# Altium PCB PCB1.PcbDoc
Units mm, origin at the board's own origin, x right, y up, seen from the top; angles counter-clockwise.
Board outline 43.43 x 43.05 mm, 2 copper layers (Top Layer, Bottom Layer); 15 components, 12 nets, 43 pads, 0 vias.
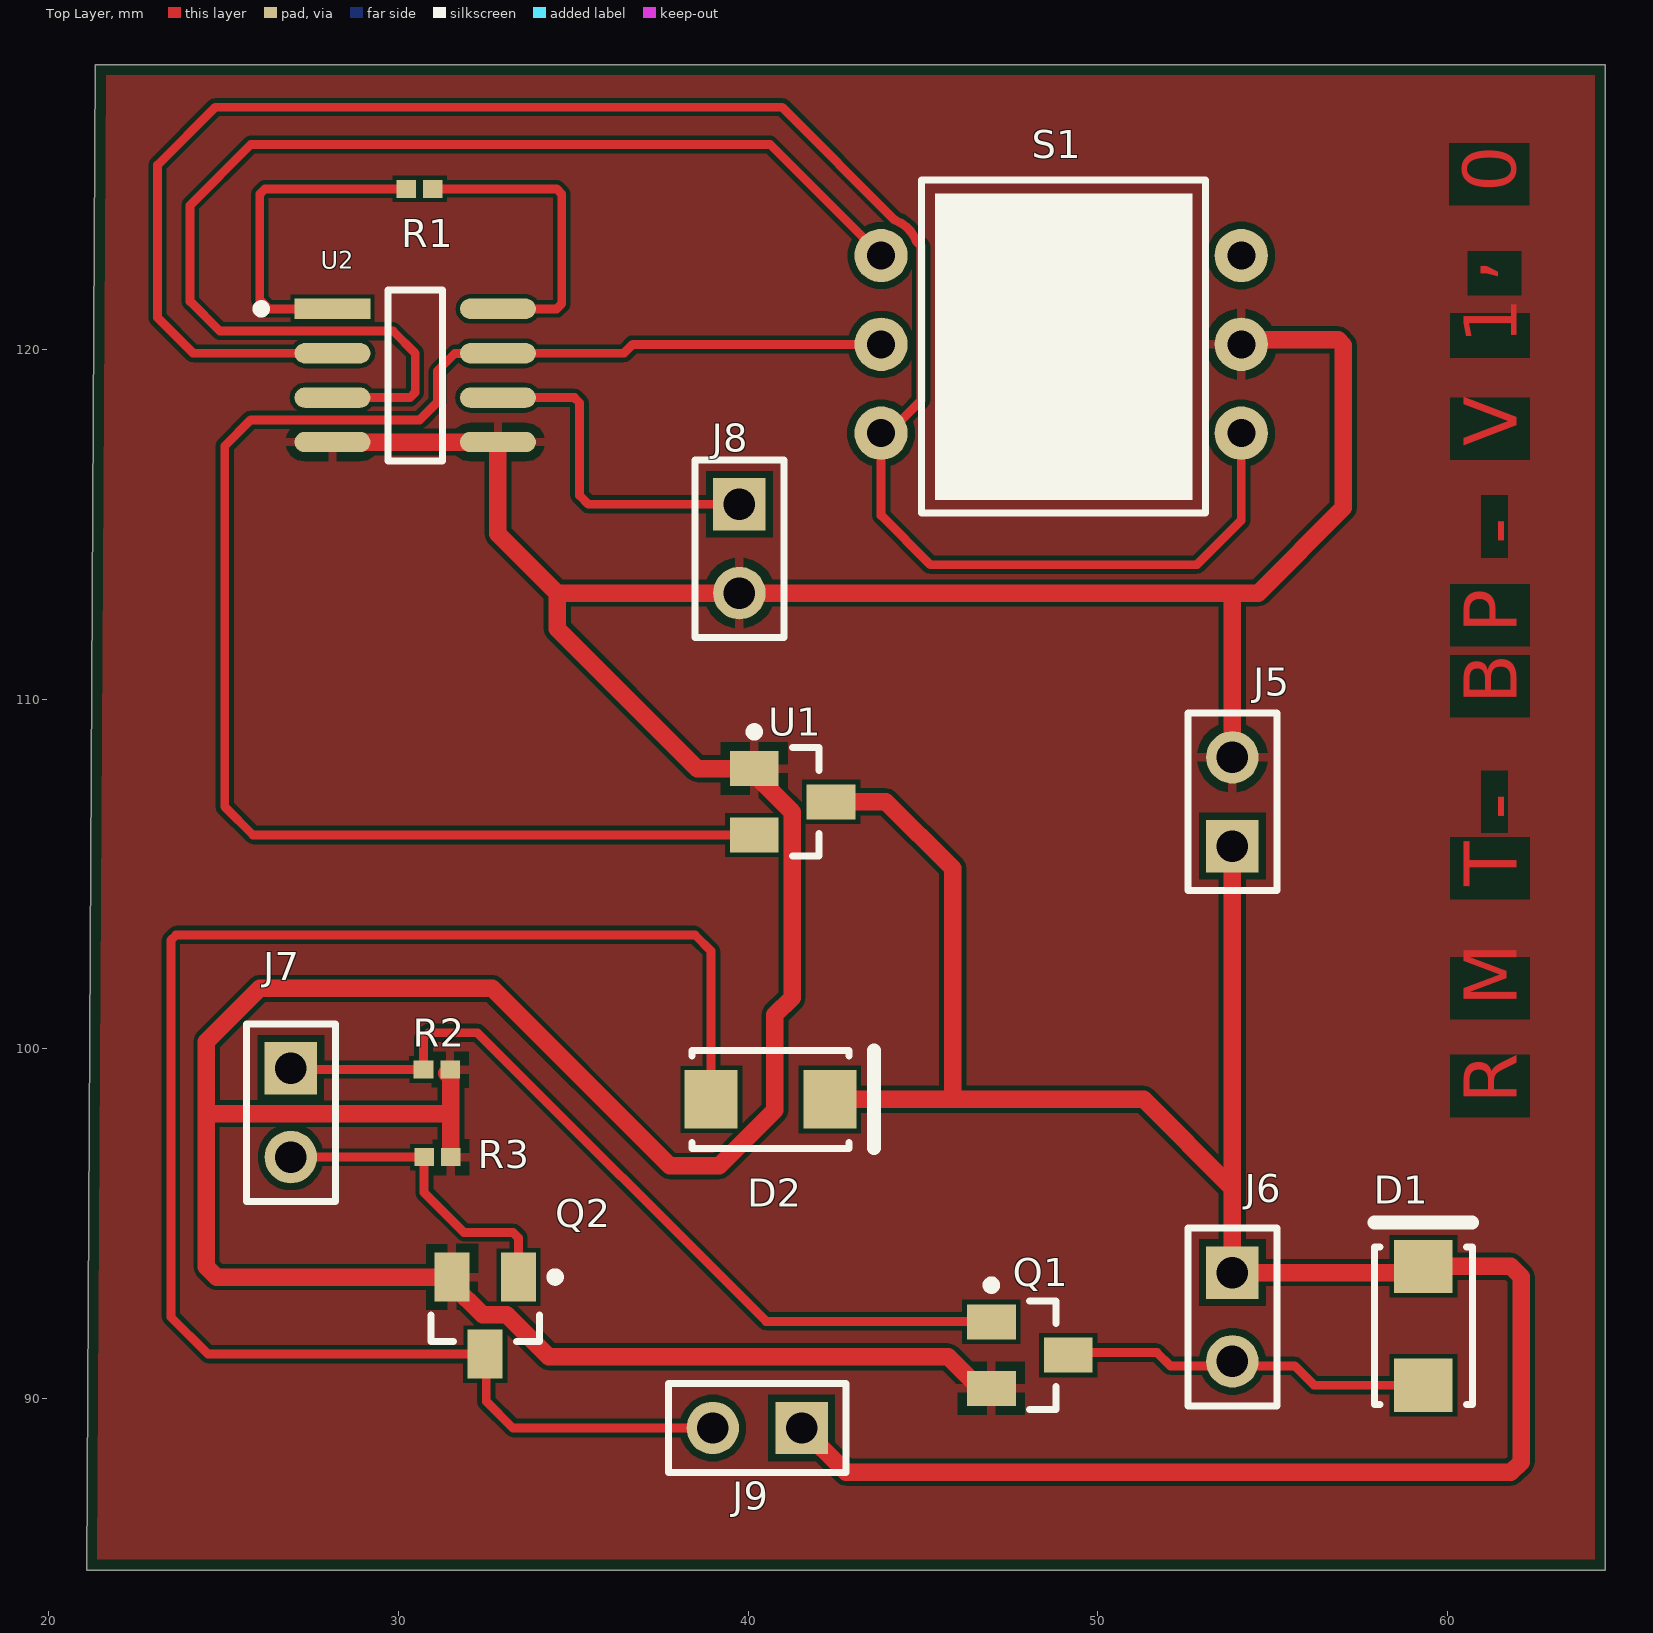
[diagram p0: Top Layer view]
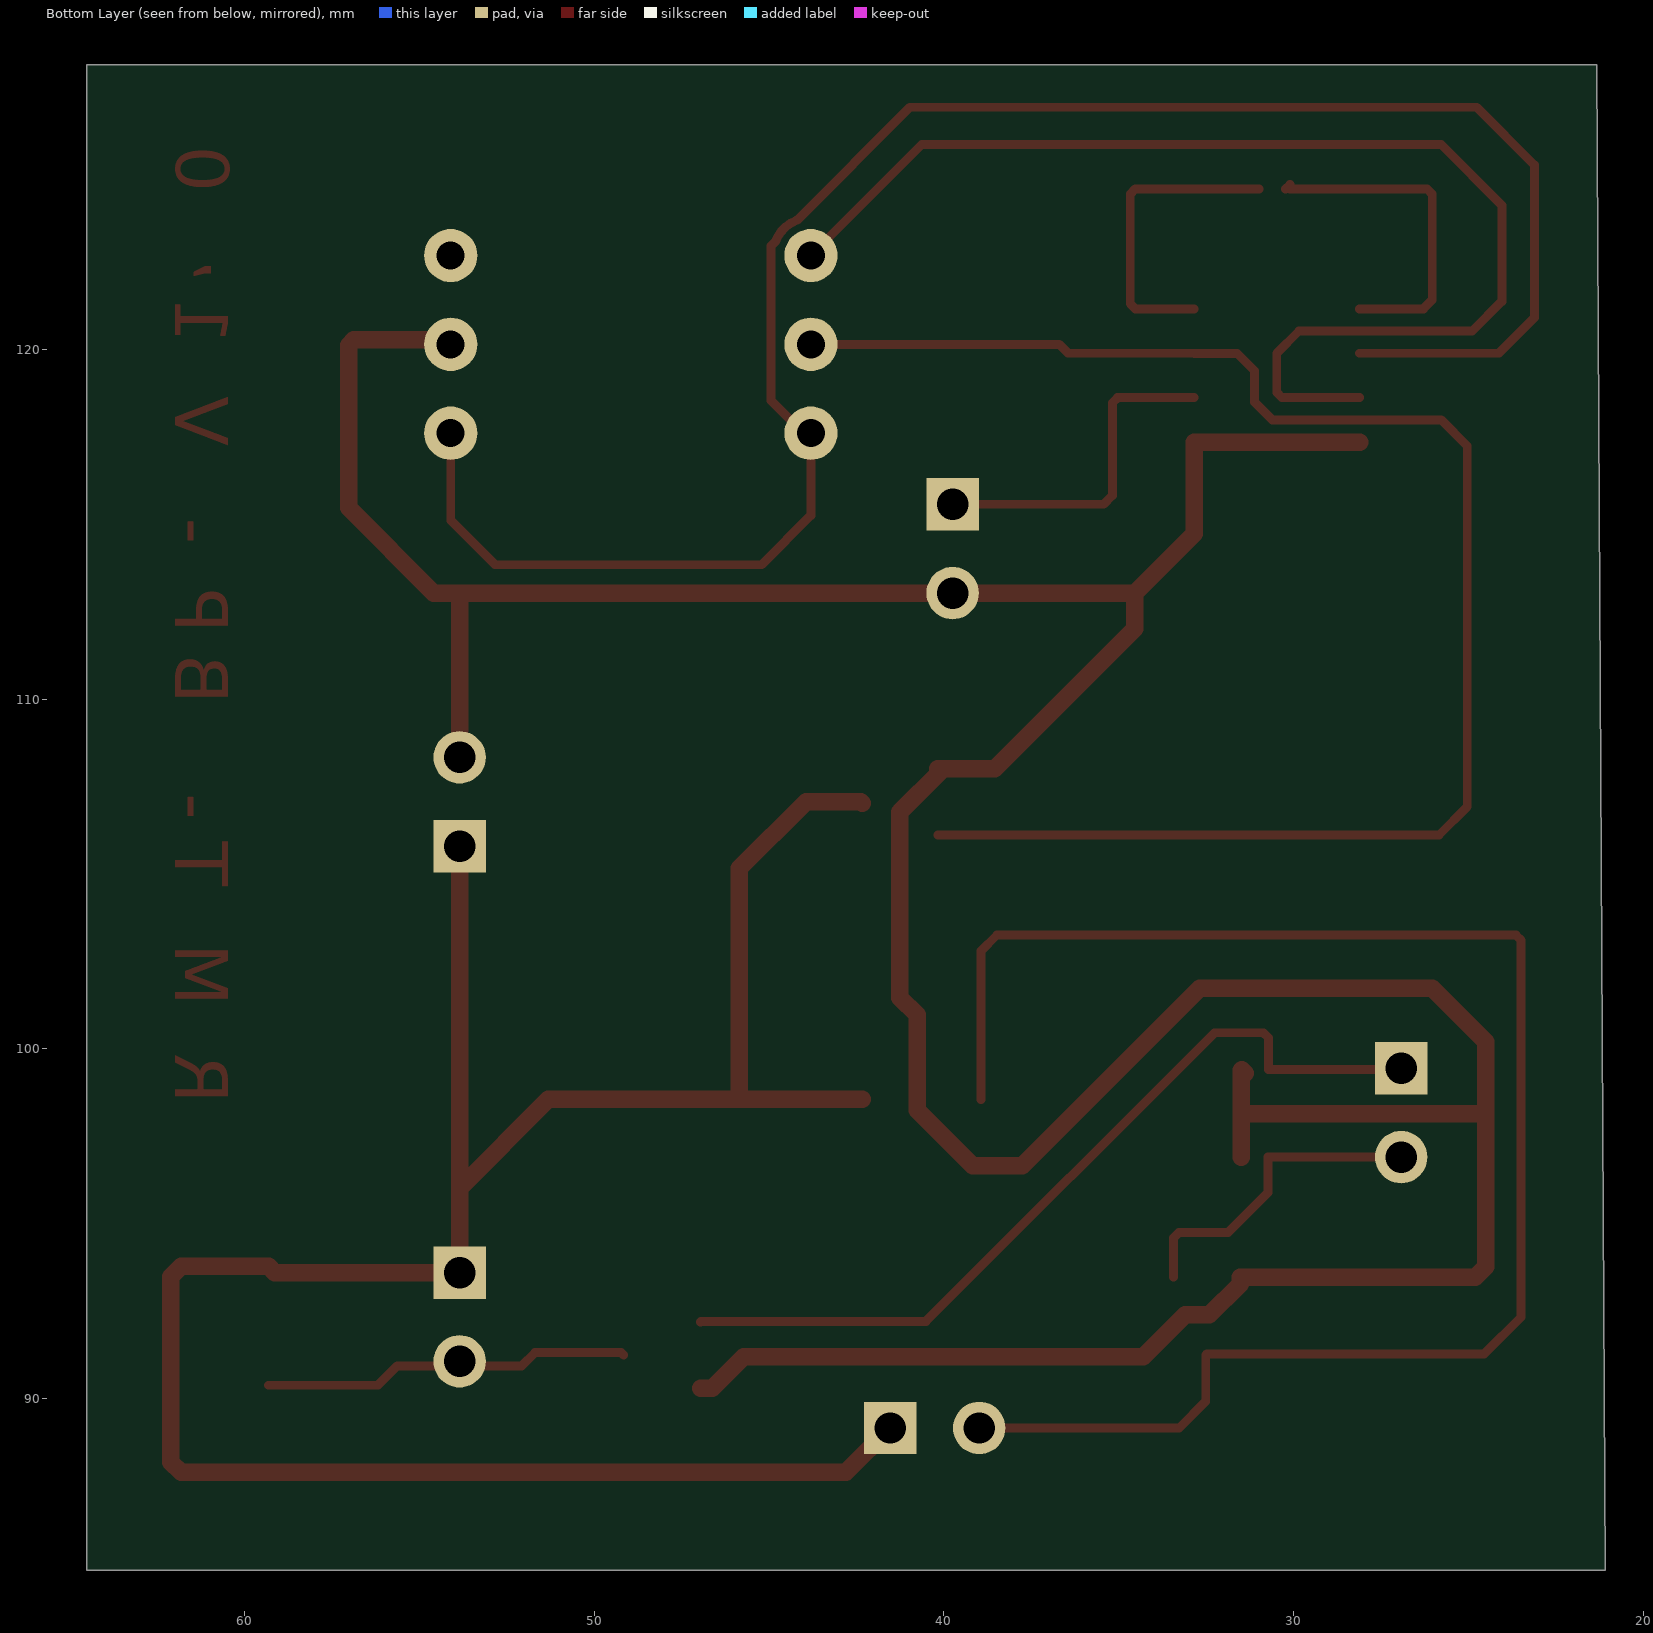
[diagram p1: Bottom Layer view, seen from below]

## Layer stack, top to bottom
Top Solder: solder mask 0.0102, Solder Resist, Dk 3.5
Top Layer: signal copper 0.0356
Dielectric 1: dielectric 0.32, FR-4, Dk 4.8
Bottom Layer: signal copper 0.0356
Bottom Solder: solder mask 0.0102, Solder Resist, Dk 3.5

## Board outline
21.082,85.09 64.516,85.09 64.516,128.143 21.336,128.143

## Design rules (kind name [scope] priority, off if disabled: settings)
BoardOutlineClearance "BoardOutlineClearance Top Layer" [OnLayer('Top Overlay')] p1: gap=0 ignorepadtopadclearanceinfootprint=FALSE except(0.3: SMDPad-OutlineEdge SMDPad-CavityEdge SMDPad-CutoutEdge SMDPad-SplitBarrior THPad-OutlineEdge THPad-CavityEdge THPad-CutoutEdge THPad-SplitBarrior Via-OutlineEdge Via-CavityEdge Via-CutoutEdge Via-SplitBarrior)
BoardOutlineClearance [All] p2: gap=0.3 ignorepadtopadclearanceinfootprint=FALSE except(0: Arc-SplitContinuation Track-SplitContinuation SMDPad-SplitContinuation THPad-SplitContinuation Via-SplitContinuation Fill-SplitContinuation Poly-SplitContinuation Region-SplitContinuation Text-OutlineEdge Text-CavityEdge Text-CutoutEdge Text-SplitBarrior Text-SplitContinuation)
Clearance "Clearance Differnt" [All] p1: gap=0.127 ignorepadtopadclearanceinfootprint=TRUE except(0.2: Arc-THPad Arc-Via Track-THPad Track-Via SMDPad-THPad SMDPad-Via THPad-Fill THPad-Poly THPad-Region Via-Fill Via-Poly Via-Region; 0.254: Arc-Hole Track-Hole SMDPad-Hole Fill-Hole Poly-Hole Region-Hole; 0.273: THPad-THPad THPad-Via Via-Via; 0.327: THPad-Hole Via-Hole)
Clearance "Clearance Same" [All] p2: gap=0 ignorepadtopadclearanceinfootprint=FALSE
ComponentClearance [All] p1: gap=0.025 collisioncheckmode=3 verticalgap=0.025 showdistances=FALSE
DiffPairsRouting [All] p1: maxlimit=0.254 minlimit=0.152 mostfreqgap=0.152 toplayer_minwidth=0.152 toplayer_maxwidth=0.381 toplayer_prefwidth=0.152 bottomlayer_minwidth=0.152 bottomlayer_maxwidth=0.381 bottomlayer_prefwidth=0.152 maxuncoupledlength=5.08
HoleSize [All] p1: absolutevalues=TRUE maxlimit=6.3 minlimit=0.3 maxpercent=80.000 minpercent=20.000
Length [InNetClass('DSI')] p1: maxlimit=66 minlimit=0
MatchedLengths [InNetClass('DSI')] p1: tolerance=0.1 checknetsindiffpair=FALSE checkdiffpairvsdiffpair=TRUE checkxsignals=TRUE checkothers=TRUE
MaximumViaCount [InNetClass('DSI')] p1: limit=10
MinimumSolderMaskSliver [All] p1: minsoldermaskwidth=0.1
NetAntennae [All] p1: netantennaetolerance=0.254
ParallelSegment [InNetClass('DSI')] p1: limit=254 gap=0.152
PolygonConnect [All] p1: connectstyle=Relief reliefconductorwidth=0.254 reliefentries=4 polygonreliefangle="90 Angle" airgapwidth=0.254
RoutingVias [All] p1: holewidth=0.3 width=0.45 viastyle="Through Hole" minholewidth=0.3 minwidth=0.45 maxholewidth=6.3 maxwidth=7 viatemplateguid#1={FE2BFA73-521A-470B-8AD5-FE63074D8BE1} viatemplatename#1=v50h30
SilkToSilkClearance [All] p1: silktosilkclearance=0
SilkToSolderMaskClearance [IsPad] p1: minsilkscreentomaskgap=0 clearancetoexposedcopper=TRUE
SolderMaskExpansion [All] p1: expansion=0.001 istentingtop=FALSE
StubLength [InNetClass('DSI')] p1: limit=25.4
UnRoutedNet [All] p1: checkbadconnections=TRUE
ViasUnderSMD [All] p1: allowed=TRUE
Width [All] p1: maxlimit=1.27 minlimit=0.127 preferedwidth=0.152 minimp=50.000000 maximp=50.000000 favimp=50.000000
22 further rules are at their usual default settings.

## Components (designator, comment, footprint, x,y, rotation, side; value= is the part's Value field where it differs from the comment)
D1 "Diode" "DIODE SMA" 59.309,92.075 r90 top
D2 "Diode" "DIODE SMA" 40.64,98.552 r0 top
J5 "Header 2" HDR1X2 53.848,105.791 r90 top
J6 "Header 2" HDR1X2 53.848,93.599 r270 top
J7 "Header 2" HDR1X2 26.924,99.441 r270 top
J8 "Header 2" HDR1X2 39.751,115.57 r270 top
J9 "Header 2" HDR1X2 41.529,89.154 r180 top
Q1 "IRLZ44NPbF" SOT23 48.054,91.238 r0 top
Q2 "IRLZ44NPbF" SOT23 32.481,92.371 r270 top
R1 "100K" 0402 30.606,124.587 r180 top
R2 "10K" 0402 31.096,99.402 r180 top
R3 "10K" 0402 31.115,96.901 r180 top
S1 "IC 6 PINS" Pressure_sensor 51.054,121.031 r180 top
U1 "IC REG" SOT23 41.275,107.061 r0 top
U2 "AD620ARZ-REEL7" FP-R-8-IPC_B 30.48,119.253 r0 top

## Footprints (in the part's own frame and the unit in brackets; to place one, negate y for a bottom-side part, rotate by r counter-clockwise, add the part's x,y. Pads: shape width x height; smd on the part's side, far side on the other; paste and mask are expansions set on the pad)
0402 [mm] "Chip Capacitor, 2-Leads, Body 1.00x0.50mm, IPC High Density"
  rect 0.56x0.52 smd: 1(-0.38,0) 2(0.38,0)
  body extent -0.53,-0.28 0.53,0.28, height 0.55
"DIODE SMA" [mm] "Molded Diode, 2-Leads, Body 4.5x2.79mm"
  rect 1.52x1.68 smd: 1(-1.7,0) 2(1.7,0)
  silkscreen extent -2.25,-1.4 2.96,1.4, body extent -2.47,-1.4 2.47,1.4, height 2.29
FP-R-8-IPC_B [mm]
  rect 2.174x0.582 smd paste+0 mask+0: 1(-2.366,1.905)
  rrect100% 2.174x0.582 smd paste+0 mask+0: 2(-2.366,0.635) 3(-2.366,-0.635) 4(-2.366,-1.905) 5(2.366,-1.905) 6(2.366,-0.635) 7(2.366,0.635) 8(2.366,1.905)
  silkscreen extent -4.53,-2.45 0.78,2.45, body extent -3.7,-2.7 3.7,2.7, height 0.25
HDR1X2 [mm] "Connector; Header; 2 Position"
  rect 1.5x1.5 hole 0.9: 1(0,0)
  round 1.5 hole 0.9: 2(2.54,0)
  silkscreen extent -1.27,-1.27 3.81,1.27
Pressure_sensor [mil]
  round 60 hole 31.5: 1(-120,135) 2(-120,35) 3(-120,-65) 4(285.51,135) 5(285.51,35) 6(285.51,-65)
  silkscreen extent -80,-150 240,225
SOT23 [mm] "SOT23, 3-Leads, Body 3.12x1.5mm, Pitch 0.95mm"
  rect 1.4x1 smd: 1(-1.1,0.95) 2(-1.1,-0.95) 3(1.1,0)
  silkscreen extent -1.22,-1.55 0.75,2.12, body extent -1.35,-1.56 1.35,1.56, height 1.2

## Part data
J5 J6 J7 J8 J9: "Header, 2-Pin", LatestRevisionDate=17-Jul-2002, LatestRevisionNote="Re-released for DXP Platform.", Publisher="Altium Limited"
Q1 Q2: library part "MOSFET N", "MOSFET N-CH 55V 47A TO220AB"
R1 R2 R3: library part RESISTOR
U2: library part CMP-09116-000354-1, "IC INST AMP 1 CIRCUIT 8SOIC", Case/Package=SOIC, Dual Supply Voltage=15V, Input Bias Current=500pA, Input Offset Voltage (Vos)=30mV, Input Resistance=10GR, Max Dual Supply Voltage=18V, Max Operating Temperature=125°C, Max Power Dissipation=650mW, Min Dual Supply Voltage=2.3V, Min Operating Temperature=-55°C, Min Supply Voltage=4.6V, Nominal Supply Current=900uA, Operating Supply Current=1.3mA, Output Current per Channel=18mA, Package Quantity=1, Power Supply Rejection Ratio (PSRR)=140dB, -3db Bandwidth=1MHz, Bandwidth=800kHz, Common Mode Rejection Ratio=93dB, Contact Plating=Tin, Lead Free="Contains Lead", Mount="Surface Mount", Number of Channels=1, Number of Circuits=1, Number of Elements=1, Number of Pins=8, Operating Supply Voltage=18V, Packaging="Tape and Reel", Power Dissipation=650mW, Radiation Hardening=No, RoHS Compliant=Yes, Series=-, Slew Rate=1.2V/µs, Supply Current=900uA

## Nets (pads, with @x,y where several pads share a name; then routed paths per layer and width w, separated by ;. In a path a pad name is that pad's centre, name@x,y a point inside that pad or via, vN(x,y) a via of type N, cw(c..) or ccw(c..) an arc to the next point about the centre after c; other vN are vias at no path point)
3.3V: S1.5 U1.2 U2.7 | length 46.3
  Top Layer w0.254: U1.2 25.842,106.111 25.033,106.92 25.033,117.235 25.781,117.983 30.607,117.983 31.115,118.491 31.115,119.38 31.615,119.88 32.838,119.88 U2.7 36.449,119.888 36.703,120.142 S1.5
5V: D1.2 D2.2 J5.1 J6.1 J9.1 U1.3 | length 70.6
  Top Layer w0.5: J9.1 42.799,87.884 61.81,87.884 62.103,88.177 62.103,93.482 61.81,93.775 D1.2 59.133,93.599 J6.1 53.848,96.012 ; D2.2 45.847,98.552 ; U1.3@42.34,107.026 U1.3 43.942,107.061 45.847,105.156 45.847,98.552 ; J5.1 53.848,96.012 ; 45.847,98.552 51.308,98.552 53.848,96.012
GND: J5.2 J8.2 Q1.2 Q2.2 R2.1 R3.1 S1.2 U1.1 U2.4 U2.5 | length 124.4
  Top Layer w0.5: U2.4 U2.5 32.846,114.726 34.542,113.03 ; R2.1@31.377,99.303 R2.1 31.495,99.383 31.495,98.142 ; R3.1 31.495,98.142 ; U1.1@40.094,107.93 41.256,106.769 41.256,101.454 40.767,100.965 40.767,98.24 39.174,96.647 37.757,96.647 32.677,101.727 26.035,101.727 24.511,100.203 24.511,98.142 ; U1.1 38.547,108.011 34.542,112.016 34.542,113.03 ; Q1.2 46.618,90.288 45.72,91.186 34.305,91.186 33.101,92.39 32.412,92.39 31.531,93.271 Q2.2 24.804,93.471 24.511,93.764 24.511,98.142 ; J5.2@53.616,108.563 J5.2 53.848,113.03 ; S1.2 54.229,120.269 56.874,120.269 57.023,120.12 57.023,115.465 54.588,113.03 53.848,113.03 ; 24.511,98.142 31.495,98.142 ; 34.542,113.03 53.848,113.03
NetD1_1: D1.1 J6.2 Q1.3 | length 10.6
  Top Layer w0.254: Q1.3 49.229,91.313 51.689,91.313 52.07,90.932 53.721,90.932 J6.2 ; J6.2@53.848,90.932 55.626,90.932 56.183,90.375 D1.1
NetD2_1: D2.1 J9.2 Q2.3 | length 48.3
  Top Layer w0.254: D2.1 38.94,102.792 38.481,103.251 23.644,103.251 23.495,103.102 23.495,92.329 24.553,91.271 Q2.3 32.512,91.24 32.512,89.916 33.274,89.154 J9.2
NetJ7_1: J7.1 Q1.1 R2.2 | length 24.4
  Top Layer w0.254: J7.1 26.963,99.402 R2.2 30.716,100.308 30.865,100.457 32.258,100.457 40.513,92.202 46.94,92.202 Q1.1 ; J7.1@26.924,99.695 J7.1@26.925,99.694
NetJ7_2: J7.2 Q2.1 R3.2 | length 9.2
  Top Layer w0.254: J7.2 R3.2 R3.2 30.734,95.885 31.877,94.742 33.282,94.742 33.431,94.593 Q2.1
NetR1_1: R1.1 U2.8 | length 8.8
  Top Layer w0.254: R1.1 34.522,124.587 34.671,124.438 34.671,121.307 34.522,121.158 U2.8
NetR1_2: R1.2 U2.1 | length 9.5
  Top Layer w0.254: U2.1 26.289,121.158 26.033,121.414 26.033,124.436 26.182,124.585 R1.2@30.103,124.585 ; R1.2@30.103,124.71 R1.2
NetS1_1: S1.1 S1.4 U2.2 | length 56.2
  Top Layer w0.254: U2.2 24.13,119.888 23.114,120.904 23.114,125.27 24.765,126.921 40.973,126.921 44.198,123.697 cw(c43.802,122.682) 44.817,123.078 44.945,122.949 44.945,118.539 44.008,117.602 S1.4 43.802,115.25 45.212,113.84 52.832,113.84 54.102,115.11 S1.1
NetS1_6: S1.6 U2.3 | length 35.1
  Top Layer w0.254: U2.3 30.331,118.618 30.48,118.767 30.48,119.888 29.845,120.523 24.892,120.523 24.045,121.37 24.045,124.121 25.781,125.857 40.627,125.857 S1.6
sensor: J8.1 U2.6 | length 9.7
  Top Layer w0.254: U2.6 35.03,118.618 35.179,118.469 35.179,115.824 35.433,115.57 J8.1
pads on no net: S1.3

## Polygon pours and split planes (outlines as drawn)
GND on Top Layer "GND_L01_P000" (solid, pour order 0): 21.336,128.143 64.516,128.143 64.516,85.217 64.389,85.09 21.082,85.09

## Other copper
Top Layer:
  text "0" at 61.956,124.496 h1.52 r90
  text "," at 61.214,121.92 h1.52 r90
  text "1" at 61.976,120.142 h1.52 r90
  text "V" at 61.976,117.221 h1.52 r90
  text "-" at 62.103,114.427 h1.52 r90
  text "P" at 61.976,111.887 h1.52 r90
  text "B" at 61.976,109.855 h1.52 r90
  text "-" at 62.103,106.553 h1.52 r90
  text "T" at 61.976,104.648 h1.52 r90
  text "M" at 61.976,101.219 h1.52 r90
  text "R" at 61.976,98.425 h1.52 r90